# EAGLE board PCB-3.5MM Input Adapter (EAGLE 9.6.2)
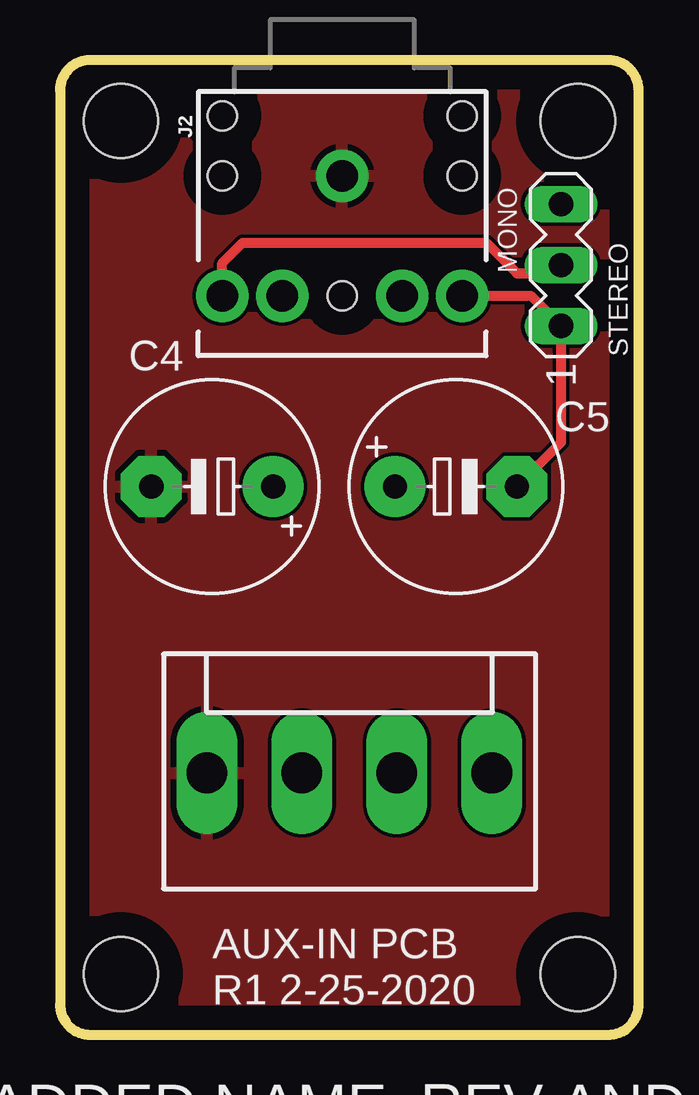
[diagram p0: board, top side]
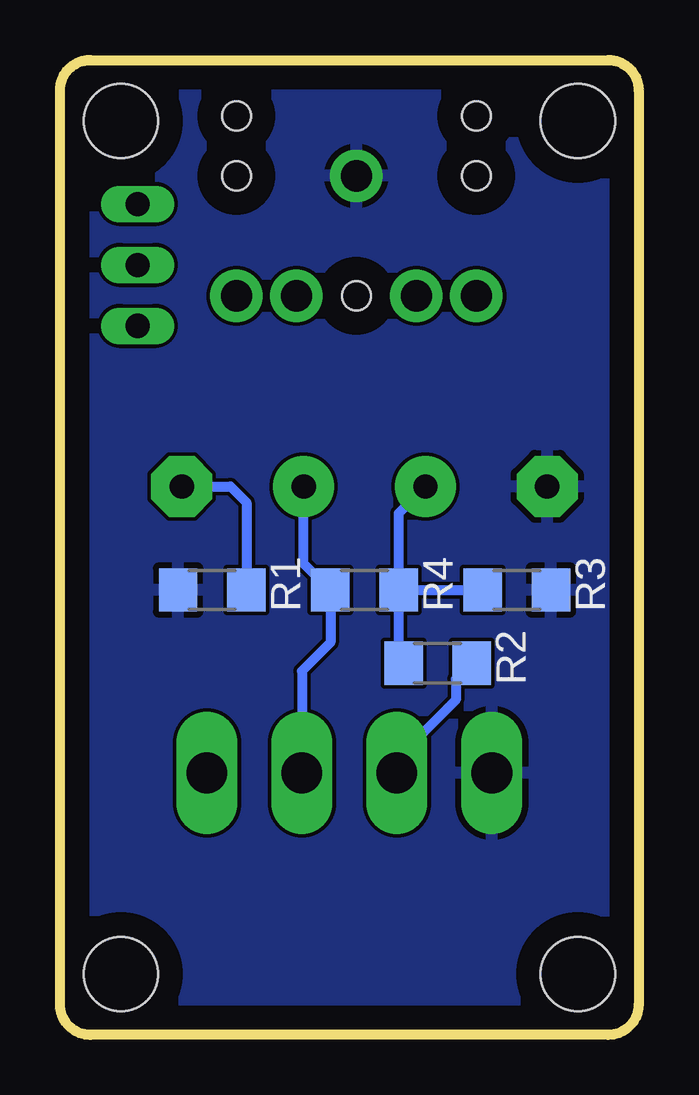
[diagram p1: board, bottom side, seen from below]

Size 24.13 x 40.64 mm. Coordinates in mm from the lower left corner, seen from the top.
Outline: 0,39.37 0,1.27 arc90 1.27,0 22.86,0 arc90 24.13,1.27 24.13,39.37 arc90 22.86,40.64 1.27,40.64 arc90 0,39.37
Copper layers (1*16): Top 0.035mm / dielectric 1.5mm / Bottom 0.035mm
Design rules "default": minimum track width 6mil, minimum drill 0.35mm, track to track 6mil, track to pad 6mil, pad to pad 6mil, via to via 6mil, smd to smd 6mil, copper to edge 40mil, drill to drill 6mil, minimum pad ring 10mil, minimum via ring 8mil, stop-mask expansion 4mil, vias tented up to drill 0.5mm, thermal gap 10mil
Holes 3.1 mm at 2.54,38.1 2.54,2.54 21.59,2.54 21.59,38.1

## Footprints (pad centres in the part's own frame; a part is rotated, then mirrored left to right if it is on the bottom)
E5-8,5 = drill 1.016 pad 2.54: + -2.54,0 | drill 1.016 pad 2.54 octagon: - 2.54,0
KK-156-4 = drill 1.7 pad 2.184 long: 1 -5.94,0; 2 -1.98,0; 3 1.98,0; 4 5.94,0
AUDIO-JACK = drill 1.3 pad 2.184: RING 5,5; RSH 5,2.5; SLEEVE 0,0; TIP 5,-5; TSH 5,-2.5 | hole 1.2: 0,5; -2.5,5; -2.5,-5; 0,-5; 5,0
R1206 = smd 1.6 x 1.803: 1 -1.422,0; 2 1.422,0
MA03-1 = drill 1.016 long: 1 -2.54,0; 2 0,0; 3 2.54,0

## Placement (x,y rotation side)
C4  10UF  [E5-8,5]  6.35,22.86 180 top
C5  10UF  [E5-8,5]  16.51,22.86 0 top
HEADER  [KK-156-4]  12.07,10.92 0 top
J2  AUDIO_JACK_3.5MM_PTH  [AUDIO-JACK]  11.77,35.81 270 top
R1  47K  [R1206]  17.78,18.54 0 bottom
R2  10K  [R1206]  8.38,15.49 0 bottom
R3  2.2K  [R1206]  5.08,18.54 180 bottom
R4  47K  [R1206]  11.43,18.54 180 bottom
ST/MN  [MA03-1]  20.89,32.09 90 top

## Library data of the parts
C4 C5 R1-R4 = adafruit
HEADER = con-molex; MF: MOLEX; OC_FARNELL: unknown; OC_NEWARK: unknown
J2 = SparkFun-Connectors; PROD_ID: CONN-08774; SF_ID: PRT-08032
ST/MN = con-lstb; OC_FARNELL: unknown; OC_NEWARK: unknown

## Nets
3VIN: HEADER.2 R2.2
AGND: C4.- HEADER.1 J2.SLEEVE R1.1 R3.1
GAIN: HEADER.4
HP1: C4.+ R2.1 R3.2 R4.1
N$2: J2.TIP ST/MN.2
N$4: C5.- J2.RING R1.2 ST/MN.1
SIGNAL: C5.+ HEADER.3 R4.2

## Tracks (layer width: path | path; a pad name or v marks a point on that pad's centre or on a via)
3VIN
  Bottom 0.406: R2.2 7.62,14.83 7.62,13.97 10.09,11.5 HEADER.2
AGND
  pour Bottom: 0,0 24.13,0 24.13,40.64 0,40.64
  pour Top: 0,0 24.13,0 24.13,40.64 0,40.64
HP1
  Bottom 0.406: R4.1 R3.2 | C4.+ 10.01,21.74 R4.1 | R4.1 10.01,15.7 R2.1
N$2
  Top 0.406: J2.TIP 6.77,32.17 7.62,33.02 17.78,33.02 19.05,31.75 20.55,31.75 ST/MN.2
N$4
  Top 0.406: J2.RING 19.63,30.81 ST/MN.1 20.89,24.7 C5.-
  Bottom 0.406: R1.2 16.36,22.2 17.02,22.86 C5.-
SIGNAL
  Bottom 0.406: C5.+ 13.97,19.66 R4.2 12.85,16.36 14.05,15.17 HEADER.3

## Text on the board
tPlace: STEREO | MONO | AUX-IN PCB / R1 2-25-2020 | 4-7-2021 - ADDED NAME, REV AND DATE TO PCB